# Altium PCB TFT_Adapter_Board_拼版.PcbDoc (part 9 of 9)
Units mm, origin at the board's own origin, x right, y up, seen from the top; angles counter-clockwise.
Board outline 137 x 166.56 mm, 2 copper layers (Top Layer, Bottom Layer); 80 components, 32 nets, 2615 pads, 0 vias.
Unrouted connection lines stored in the file: 1248.
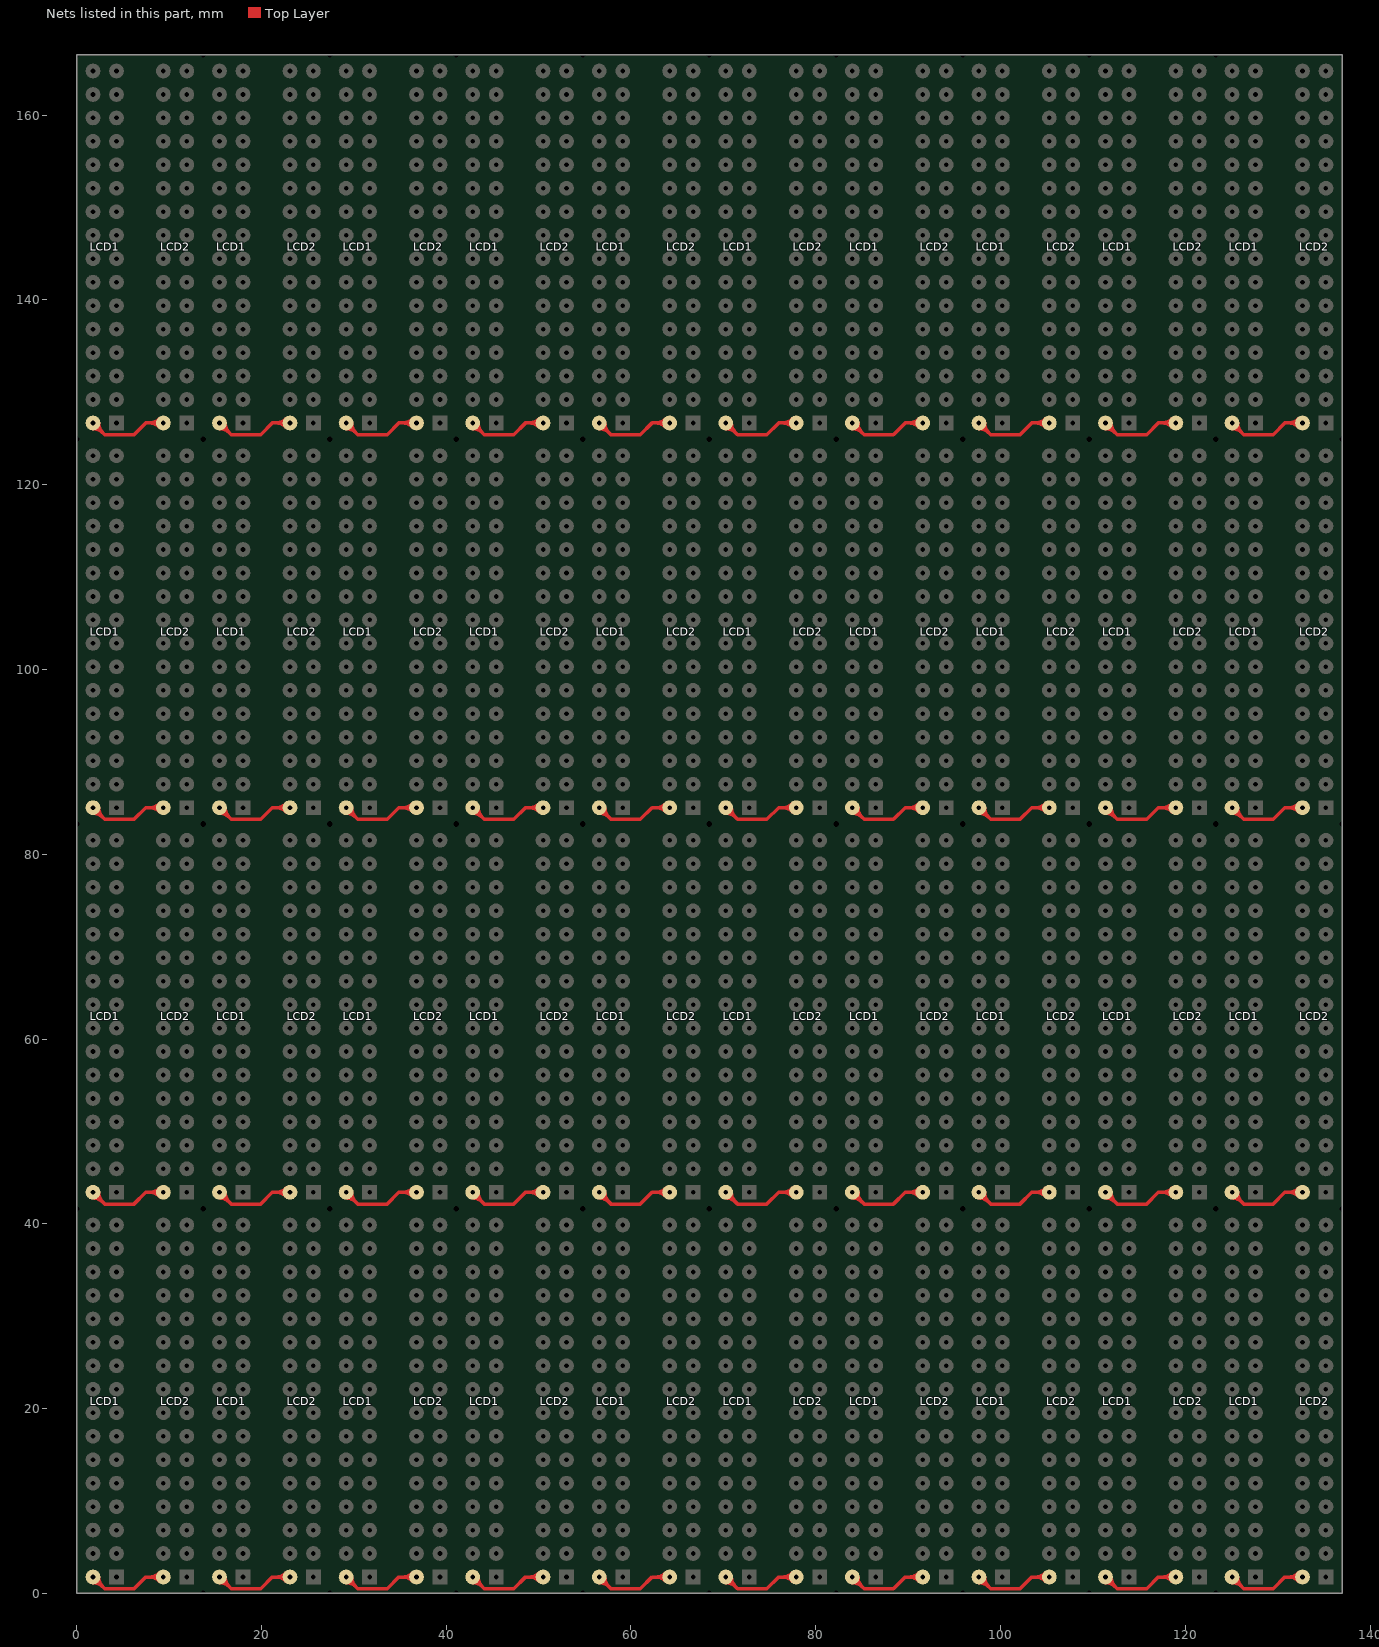
[diagram p9: the nets of this part, all layers, seen from the top]

## Nets (pads, with @x,y where several pads share a name; then routed paths per layer and width w, separated by ;. In a path a pad name is that pad's centre, name@x,y a point inside that pad or via, vN(x,y) a via of type N, cw(c..) or ccw(c..) an arc to the next point about the centre after c; other vN are vias at no path point) (continued)
NetLCD1_32: LCD1.32 LCD2.32 | length 531.8
  Top Layer w0.381: LCD1.32@1.77,1.161 cw(c1.77,-0.311) 2.81,0.73 cw(c3.851,1.77) LCD1.32@2.379,1.77 ; LCD1.32@1.77,1.77 3.04,0.5 6.215,0.5 7.485,1.77 LCD2.32@9.39,1.77 ; LCD1.32@1.77,42.8 cw(c1.77,41.329) 2.81,42.37 cw(c3.851,43.41) LCD1.32@2.379,43.41 ; LCD1.32@1.77,43.41 3.04,42.14 6.215,42.14 7.485,43.41 LCD2.32@9.39,43.41 ; LCD1.32@1.77,84.44 cw(c1.77,82.969) 2.81,84.01 cw(c3.851,85.05) LCD1.32@2.379,85.05 ; LCD1.32@1.77,85.05 3.04,83.78 6.215,83.78 7.485,85.05 LCD2.32@9.39,85.05 ; LCD1.32@1.77,126.08 cw(c1.77,124.609) 2.81,125.65 cw(c3.851,126.69) LCD1.32@2.379,126.69 ; LCD1.32@1.77,126.69 3.04,125.42 6.215,125.42 7.485,126.69 LCD2.32@9.39,126.69 ; LCD2.32@8.959,1.339 ccw(c7.919,0.299) 7.919,1.77 ccw(c7.919,3.241) LCD2.32@8.959,2.201 ; LCD2.32@8.959,42.979 ccw(c7.919,41.939) 7.919,43.41 ccw(c7.919,44.881) LCD2.32@8.959,43.841 ; LCD2.32@8.959,84.619 ccw(c7.919,83.579) 7.919,85.05 ccw(c7.919,86.521) LCD2.32@8.959,85.481 ; LCD2.32@8.959,126.259 ccw(c7.919,125.219) 7.919,126.69 ccw(c7.919,128.161) LCD2.32@8.959,127.121 ; LCD1.32@15.47,1.161 cw(c15.47,-0.311) 16.51,0.73 cw(c17.551,1.77) LCD1.32@16.079,1.77 ; LCD1.32@15.47,1.77 16.74,0.5 19.915,0.5 21.185,1.77 LCD2.32@23.09,1.77 ; LCD1.32@15.47,42.8 cw(c15.47,41.329) 16.51,42.37 cw(c17.551,43.41) LCD1.32@16.079,43.41 ; LCD1.32@15.47,43.41 16.74,42.14 19.915,42.14 21.185,43.41 LCD2.32@23.09,43.41 ; LCD1.32@15.47,84.44 cw(c15.47,82.969) 16.51,84.01 cw(c17.551,85.05) LCD1.32@16.079,85.05 ; LCD1.32@15.47,85.05 16.74,83.78 19.915,83.78 21.185,85.05 LCD2.32@23.09,85.05 ; LCD1.32@15.47,126.08 cw(c15.47,124.609) 16.51,125.65 cw(c17.551,126.69) LCD1.32@16.079,126.69 ; LCD1.32@15.47,126.69 16.74,125.42 19.915,125.42 21.185,126.69 LCD2.32@23.09,126.69 ; LCD2.32@22.659,1.339 ccw(c21.619,0.299) 21.619,1.77 ccw(c21.619,3.241) LCD2.32@22.659,2.201 ; LCD2.32@22.659,42.979 ccw(c21.619,41.939) 21.619,43.41 ccw(c21.619,44.881) LCD2.32@22.659,43.841 ; LCD2.32@22.659,84.619 ccw(c21.619,83.579) 21.619,85.05 ccw(c21.619,86.521) LCD2.32@22.659,85.481 ; LCD2.32@22.659,126.259 ccw(c21.619,125.219) 21.619,126.69 ccw(c21.619,128.161) LCD2.32@22.659,127.121 ; LCD1.32@29.17,1.161 cw(c29.17,-0.311) 30.21,0.73 cw(c31.251,1.77) LCD1.32@29.779,1.77 ; LCD1.32@29.17,1.77 30.44,0.5 33.615,0.5 34.885,1.77 LCD2.32@36.79,1.77 ; LCD1.32@29.17,42.8 cw(c29.17,41.329) 30.21,42.37 cw(c31.251,43.41) LCD1.32@29.779,43.41 ; LCD1.32@29.17,43.41 30.44,42.14 33.615,42.14 34.885,43.41 LCD2.32@36.79,43.41 ; LCD1.32@29.17,84.44 cw(c29.17,82.969) 30.21,84.01 cw(c31.251,85.05) LCD1.32@29.779,85.05 ; LCD1.32@29.17,85.05 30.44,83.78 33.615,83.78 34.885,85.05 LCD2.32@36.79,85.05 ; LCD1.32@29.17,126.08 cw(c29.17,124.609) 30.21,125.65 cw(c31.251,126.69) LCD1.32@29.779,126.69 ; LCD1.32@29.17,126.69 30.44,125.42 33.615,125.42 34.885,126.69 LCD2.32@36.79,126.69 ; LCD2.32@36.359,1.339 ccw(c35.319,0.299) 35.319,1.77 ccw(c35.319,3.241) LCD2.32@36.359,2.201 ; LCD2.32@36.359,42.979 ccw(c35.319,41.939) 35.319,43.41 ccw(c35.319,44.881) LCD2.32@36.359,43.841 ; LCD2.32@36.359,84.619 ccw(c35.319,83.579) 35.319,85.05 ccw(c35.319,86.521) LCD2.32@36.359,85.481 ; LCD2.32@36.359,126.259 ccw(c35.319,125.219) 35.319,126.69 ccw(c35.319,128.161) LCD2.32@36.359,127.121 ; LCD1.32@42.87,1.161 cw(c42.87,-0.311) 43.91,0.73 cw(c44.951,1.77) LCD1.32@43.479,1.77 ; LCD1.32@42.87,1.77 44.14,0.5 47.315,0.5 48.585,1.77 LCD2.32@50.49,1.77 ; LCD1.32@42.87,42.8 cw(c42.87,41.329) 43.91,42.37 cw(c44.951,43.41) LCD1.32@43.479,43.41 ; LCD1.32@42.87,43.41 44.14,42.14 47.315,42.14 48.585,43.41 LCD2.32@50.49,43.41 ; LCD1.32@42.87,84.44 cw(c42.87,82.969) 43.91,84.01 cw(c44.951,85.05) LCD1.32@43.479,85.05 ; LCD1.32@42.87,85.05 44.14,83.78 47.315,83.78 48.585,85.05 LCD2.32@50.49,85.05 ; LCD1.32@42.87,126.08 cw(c42.87,124.609) 43.91,125.65 cw(c44.951,126.69) LCD1.32@43.479,126.69 ; LCD1.32@42.87,126.69 44.14,125.42 47.315,125.42 48.585,126.69 LCD2.32@50.49,126.69 ; LCD2.32@50.059,1.339 ccw(c49.019,0.299) 49.019,1.77 ccw(c49.019,3.241) LCD2.32@50.059,2.201 ; LCD2.32@50.059,42.979 ccw(c49.019,41.939) 49.019,43.41 ccw(c49.019,44.881) LCD2.32@50.059,43.841 ; LCD2.32@50.059,84.619 ccw(c49.019,83.579) 49.019,85.05 ccw(c49.019,86.521) LCD2.32@50.059,85.481 ; LCD2.32@50.059,126.259 ccw(c49.019,125.219) 49.019,126.69 ccw(c49.019,128.161) LCD2.32@50.059,127.121 ; LCD1.32@56.57,1.161 cw(c56.57,-0.311) 57.61,0.73 cw(c58.651,1.77) LCD1.32@57.179,1.77 ; LCD1.32@56.57,1.77 57.84,0.5 61.015,0.5 62.285,1.77 LCD2.32@64.19,1.77 ; LCD1.32@56.57,42.8 cw(c56.57,41.329) 57.61,42.37 cw(c58.651,43.41) LCD1.32@57.179,43.41 ; LCD1.32@56.57,43.41 57.84,42.14 61.015,42.14 62.285,43.41 LCD2.32@64.19,43.41 ; LCD1.32@56.57,84.44 cw(c56.57,82.969) 57.61,84.01 cw(c58.651,85.05) LCD1.32@57.179,85.05 ; LCD1.32@56.57,85.05 57.84,83.78 61.015,83.78 62.285,85.05 LCD2.32@64.19,85.05 ; LCD1.32@56.57,126.08 cw(c56.57,124.609) 57.61,125.65 cw(c58.651,126.69) LCD1.32@57.179,126.69 ; LCD1.32@56.57,126.69 57.84,125.42 61.015,125.42 62.285,126.69 LCD2.32@64.19,126.69 ; LCD2.32@63.759,1.339 ccw(c62.719,0.299) 62.719,1.77 ccw(c62.719,3.241) LCD2.32@63.759,2.201 ; LCD2.32@63.759,42.979 ccw(c62.719,41.939) 62.719,43.41 ccw(c62.719,44.881) LCD2.32@63.759,43.841 ; LCD2.32@63.759,84.619 ccw(c62.719,83.579) 62.719,85.05 ccw(c62.719,86.521) LCD2.32@63.759,85.481 ; LCD2.32@63.759,126.259 ccw(c62.719,125.219) 62.719,126.69 ccw(c62.719,128.161) LCD2.32@63.759,127.121 ; LCD1.32@70.27,1.161 cw(c70.27,-0.311) 71.31,0.73 cw(c72.351,1.77) LCD1.32@70.879,1.77 ; LCD1.32@70.27,1.77 71.54,0.5 74.715,0.5 75.985,1.77 LCD2.32@77.89,1.77 ; LCD1.32@70.27,42.8 cw(c70.27,41.329) 71.31,42.37 cw(c72.351,43.41) LCD1.32@70.879,43.41 ; LCD1.32@70.27,43.41 71.54,42.14 74.715,42.14 75.985,43.41 LCD2.32@77.89,43.41 ; LCD1.32@70.27,84.44 cw(c70.27,82.969) 71.31,84.01 cw(c72.351,85.05) LCD1.32@70.879,85.05 ; LCD1.32@70.27,85.05 71.54,83.78 74.715,83.78 75.985,85.05 LCD2.32@77.89,85.05 ; LCD1.32@70.27,126.08 cw(c70.27,124.609) 71.31,125.65 cw(c72.351,126.69) LCD1.32@70.879,126.69 ; LCD1.32@70.27,126.69 71.54,125.42 74.715,125.42 75.985,126.69 LCD2.32@77.89,126.69 ; LCD2.32@77.459,1.339 ccw(c76.419,0.299) 76.419,1.77 ccw(c76.419,3.241) LCD2.32@77.459,2.201 ; LCD2.32@77.459,42.979 ccw(c76.419,41.939) 76.419,43.41 ccw(c76.419,44.881) LCD2.32@77.459,43.841 ; LCD2.32@77.459,84.619 ccw(c76.419,83.579) 76.419,85.05 ccw(c76.419,86.521) LCD2.32@77.459,85.481 ; LCD2.32@77.459,126.259 ccw(c76.419,125.219) 76.419,126.69 ccw(c76.419,128.161) LCD2.32@77.459,127.121 ; LCD1.32@83.97,1.161 cw(c83.97,-0.311) 85.01,0.73 cw(c86.051,1.77) LCD1.32@84.579,1.77 ; LCD1.32@83.97,1.77 85.24,0.5 88.415,0.5 89.685,1.77 LCD2.32@91.59,1.77 ; LCD1.32@83.97,42.8 cw(c83.97,41.329) 85.01,42.37 cw(c86.051,43.41) LCD1.32@84.579,43.41 ; LCD1.32@83.97,43.41 85.24,42.14 88.415,42.14 89.685,43.41 LCD2.32@91.59,43.41 ; LCD1.32@83.97,84.44 cw(c83.97,82.969) 85.01,84.01 cw(c86.051,85.05) LCD1.32@84.579,85.05 ; LCD1.32@83.97,85.05 85.24,83.78 88.415,83.78 89.685,85.05 LCD2.32@91.59,85.05 ; LCD1.32@83.97,126.08 cw(c83.97,124.609) 85.01,125.65 cw(c86.051,126.69) LCD1.32@84.579,126.69 ; LCD1.32@83.97,126.69 85.24,125.42 88.415,125.42 89.685,126.69 LCD2.32@91.59,126.69 ; LCD2.32@91.159,1.339 ccw(c90.119,0.299) 90.119,1.77 ccw(c90.119,3.241) LCD2.32@91.159,2.201 ; LCD2.32@91.159,42.979 ccw(c90.119,41.939) 90.119,43.41 ccw(c90.119,44.881) LCD2.32@91.159,43.841 ; LCD2.32@91.159,84.619 ccw(c90.119,83.579) 90.119,85.05 ccw(c90.119,86.521) LCD2.32@91.159,85.481 ; LCD2.32@91.159,126.259 ccw(c90.119,125.219) 90.119,126.69 ccw(c90.119,128.161) LCD2.32@91.159,127.121 ; LCD1.32@97.67,1.161 cw(c97.67,-0.311) 98.71,0.73 cw(c99.751,1.77) LCD1.32@98.279,1.77 ; LCD1.32@97.67,1.77 98.94,0.5 102.115,0.5 103.385,1.77 LCD2.32@105.29,1.77 ; LCD1.32@97.67,42.8 cw(c97.67,41.329) 98.71,42.37 cw(c99.751,43.41) LCD1.32@98.279,43.41 ; LCD1.32@97.67,43.41 98.94,42.14 102.115,42.14 103.385,43.41 LCD2.32@105.29,43.41 ; LCD1.32@97.67,84.44 cw(c97.67,82.969) 98.71,84.01 cw(c99.751,85.05) LCD1.32@98.279,85.05 ; LCD1.32@97.67,85.05 98.94,83.78 102.115,83.78 103.385,85.05 LCD2.32@105.29,85.05 ; LCD1.32@97.67,126.08 cw(c97.67,124.609) 98.71,125.65 cw(c99.751,126.69) LCD1.32@98.279,126.69 ; LCD1.32@97.67,126.69 98.94,125.42 102.115,125.42 103.385,126.69 LCD2.32@105.29,126.69 ; LCD2.32@104.859,1.339 ccw(c103.819,0.299) 103.819,1.77 ccw(c103.819,3.241) LCD2.32@104.859,2.201 ; LCD2.32@104.859,42.979 ccw(c103.819,41.939) 103.819,43.41 ccw(c103.819,44.881) LCD2.32@104.859,43.841 ; LCD2.32@104.859,84.619 ccw(c103.819,83.579) 103.819,85.05 ccw(c103.819,86.521) LCD2.32@104.859,85.481 ; LCD2.32@104.859,126.259 ccw(c103.819,125.219) 103.819,126.69 ccw(c103.819,128.161) LCD2.32@104.859,127.121 ; LCD1.32@111.37,1.161 cw(c111.37,-0.311) 112.41,0.73 cw(c113.451,1.77) LCD1.32@111.979,1.77 ; LCD1.32@111.37,1.77 112.64,0.5 115.815,0.5 117.085,1.77 LCD2.32@118.99,1.77 ; LCD1.32@111.37,42.8 cw(c111.37,41.329) 112.41,42.37 cw(c113.451,43.41) LCD1.32@111.979,43.41 ; LCD1.32@111.37,43.41 112.64,42.14 115.815,42.14 117.085,43.41 LCD2.32@118.99,43.41 ; LCD1.32@111.37,84.44 cw(c111.37,82.969) 112.41,84.01 cw(c113.451,85.05) LCD1.32@111.979,85.05 ; LCD1.32@111.37,85.05 112.64,83.78 115.815,83.78 117.085,85.05 LCD2.32@118.99,85.05 ; LCD1.32@111.37,126.08 cw(c111.37,124.609) 112.41,125.65 cw(c113.451,126.69) LCD1.32@111.979,126.69 ; LCD1.32@111.37,126.69 112.64,125.42 115.815,125.42 117.085,126.69 LCD2.32@118.99,126.69 ; LCD2.32@118.559,1.339 ccw(c117.519,0.299) 117.519,1.77 ccw(c117.519,3.241) LCD2.32@118.559,2.201 ; LCD2.32@118.559,42.979 ccw(c117.519,41.939) 117.519,43.41 ccw(c117.519,44.881) LCD2.32@118.559,43.841 ; LCD2.32@118.559,84.619 ccw(c117.519,83.579) 117.519,85.05 ccw(c117.519,86.521) LCD2.32@118.559,85.481 ; LCD2.32@118.559,126.259 ccw(c117.519,125.219) 117.519,126.69 ccw(c117.519,128.161) LCD2.32@118.559,127.121 ; LCD1.32@125.07,1.161 cw(c125.07,-0.311) 126.11,0.73 cw(c127.151,1.77) LCD1.32@125.679,1.77 ; LCD1.32@125.07,1.77 126.34,0.5 129.515,0.5 130.785,1.77 LCD2.32@132.69,1.77 ; LCD1.32@125.07,42.8 cw(c125.07,41.329) 126.11,42.37 cw(c127.151,43.41) LCD1.32@125.679,43.41 ; LCD1.32@125.07,43.41 126.34,42.14 129.515,42.14 130.785,43.41 LCD2.32@132.69,43.41 ; LCD1.32@125.07,84.44 cw(c125.07,82.969) 126.11,84.01 cw(c127.151,85.05) LCD1.32@125.679,85.05 ; LCD1.32@125.07,85.05 126.34,83.78 129.515,83.78 130.785,85.05 LCD2.32@132.69,85.05 ; LCD1.32@125.07,126.08 cw(c125.07,124.609) 126.11,125.65 cw(c127.151,126.69) LCD1.32@125.679,126.69 ; LCD1.32@125.07,126.69 126.34,125.42 129.515,125.42 130.785,126.69 LCD2.32@132.69,126.69 ; LCD2.32@132.259,1.339 ccw(c131.219,0.299) 131.219,1.77 ccw(c131.219,3.241) LCD2.32@132.259,2.201 ; LCD2.32@132.259,42.979 ccw(c131.219,41.939) 131.219,43.41 ccw(c131.219,44.881) LCD2.32@132.259,43.841 ; LCD2.32@132.259,84.619 ccw(c131.219,83.579) 131.219,85.05 ccw(c131.219,86.521) LCD2.32@132.259,85.481 ; LCD2.32@132.259,126.259 ccw(c131.219,125.219) 131.219,126.69 ccw(c131.219,128.161) LCD2.32@132.259,127.121

## Silkscreen, mask and mechanical layers (free items; w line width, h text height)
Mechanical 1:
  drawing of 160 lines, arcs and shapes, not listed